# Altium PCB doppler.PcbDoc (part 1 of 2)
Units mil, origin at the board's own origin, x right, y up, seen from the top; angles counter-clockwise.
Board outline 6000 x 4000 mil, 2 copper layers (Top Layer, Bottom Layer); 102 components, 73 nets, 370 pads, 9 vias.
Unrouted connection lines stored in the file: 254.
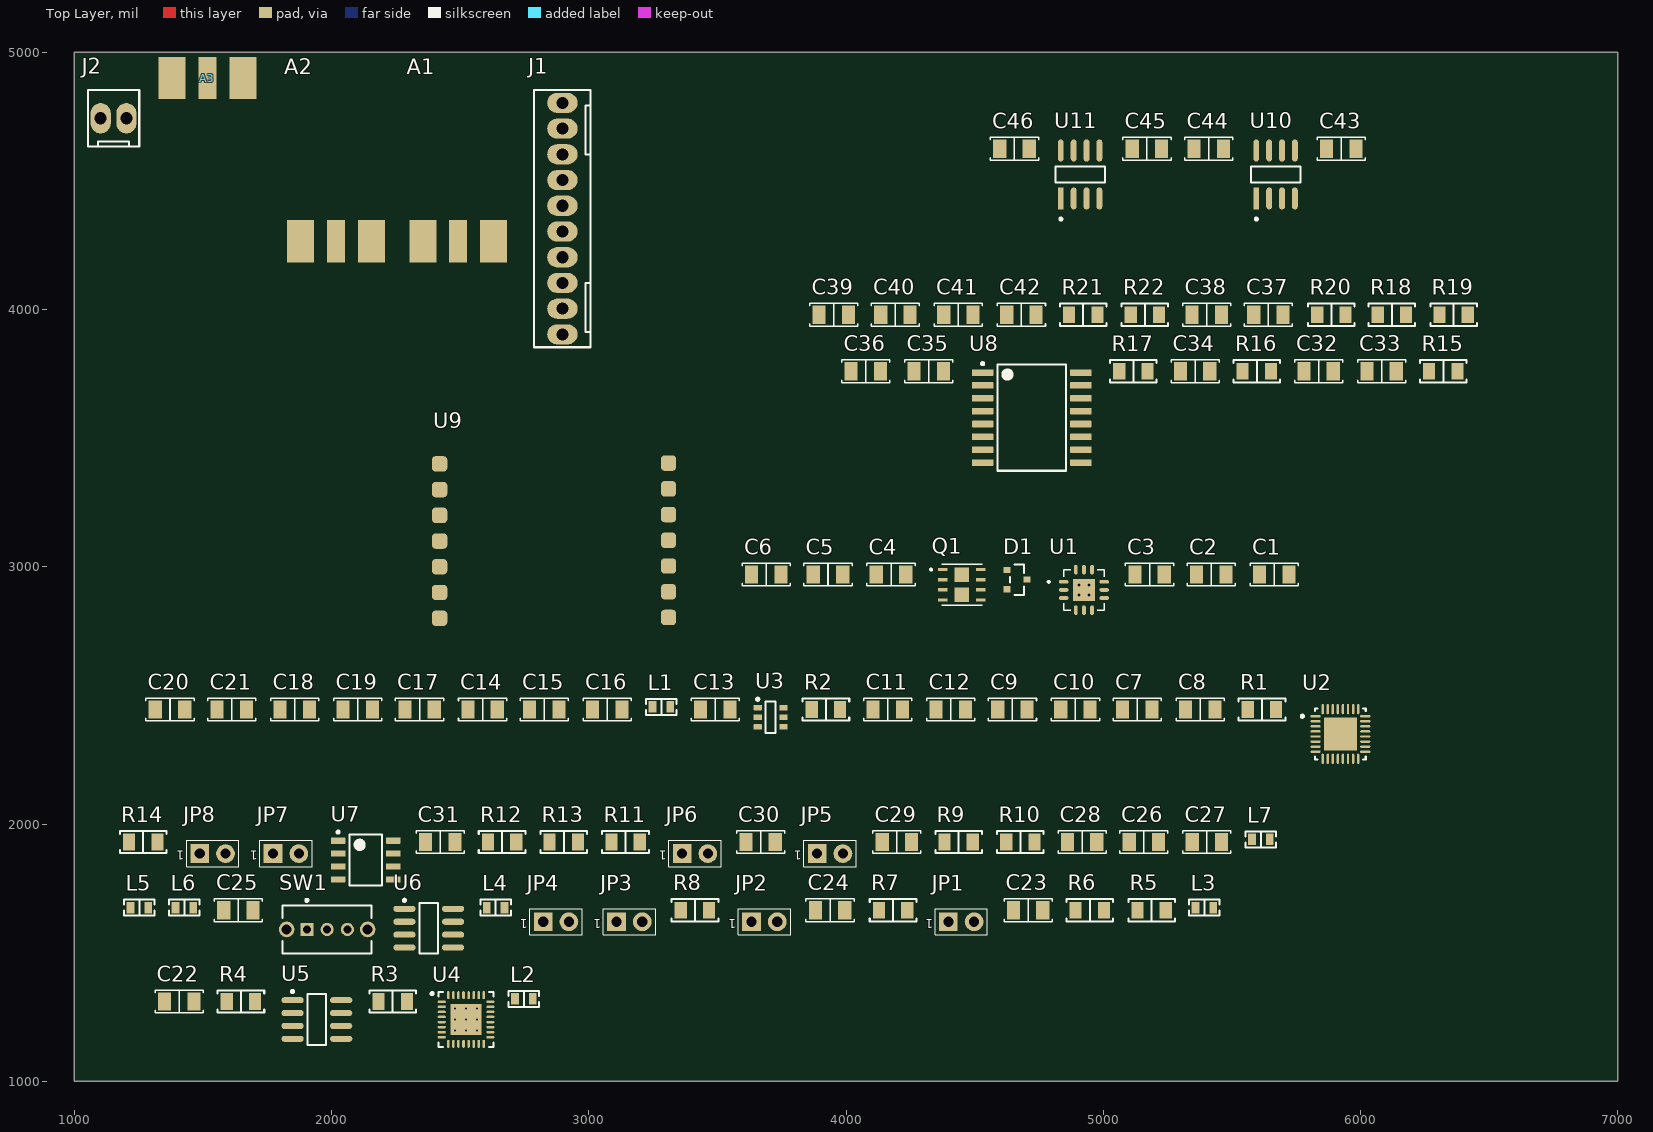
[diagram p0: Top Layer view]
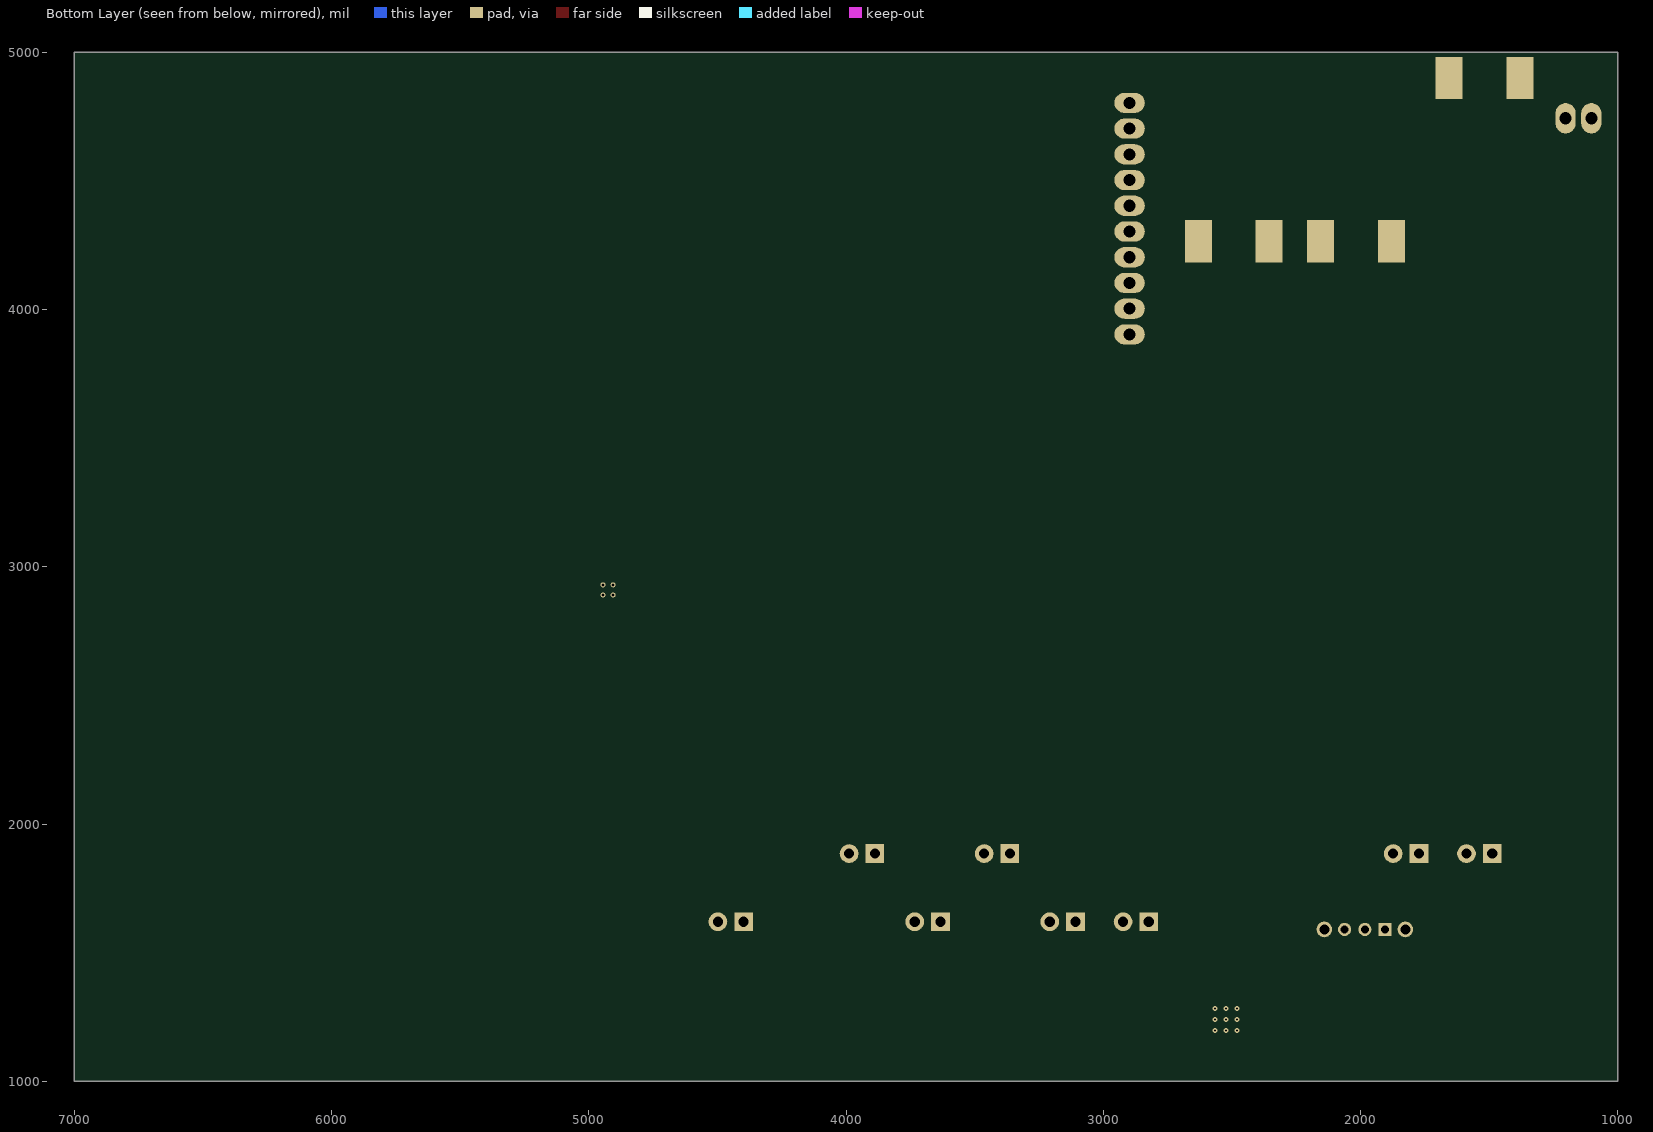
[diagram p1: Bottom Layer view, seen from below]

## Layer stack, top to bottom
Top Solder: solder mask 0.4, Solder Resist, Dk 3.5
Top Layer: signal copper 1.4
Dielectric 1: dielectric 12.6, FR-4, Dk 4.8
Bottom Layer: signal copper 1.4
Bottom Solder: solder mask 0.4, Solder Resist, Dk 3.5

## Board outline
1000,1000 7000,1000 7000,5000 1000,5000

## Design rules (kind name [scope] priority, off if disabled: settings)
Clearance [All] p1: gap=10 ignorepadtopadclearanceinfootprint=FALSE except(0: Arc-Hole Track-Hole SMDPad-Hole THPad-Hole Via-Hole Fill-Hole Poly-Hole Region-Hole Text-Hole)
PolygonConnect [All] p1: connectstyle=Relief reliefconductorwidth=10 reliefentries=4 polygonreliefangle="90 Angle" airgapwidth=10
RoomDefinition wallfilter [InComponentClass('wallfilter')] p1: confinementstyle=ConfineIn formatcopy=TRUE lockcomponents=FALSE outline 3847.09,3320 6437.09,3320 6437.09,4135 3847.09,4135
RoomDefinition preamp [InComponentClass('preamp')] p2: confinementstyle=ConfineIn formatcopy=TRUE lockcomponents=FALSE outline 1267.09,2200 6072.09,2200 6072.09,2600 1267.09,2600
RoomDefinition powerstage [InComponentClass('powerstage')] p3: confinementstyle=ConfineIn formatcopy=TRUE lockcomponents=FALSE outline 3585,2795 5770,2795 5770,3125 3585,3125
RoomDefinition demodulation [InComponentClass('demodulation')] p4: confinementstyle=ConfineIn formatcopy=TRUE lockcomponents=FALSE outline 1167.91,1075 5732.91,1075 5732.91,2085 1167.91,2085
RoomDefinition bpf [InComponentClass('bpf')] p5: confinementstyle=ConfineIn formatcopy=TRUE lockcomponents=FALSE outline 3350,2688 3350,3513 2280,3513 2280,2688
RoomDefinition 1_toplevel [InComponentClass('1_toplevel')] p6: confinementstyle=ConfineIn formatcopy=TRUE lockcomponents=FALSE outline 905,490 7780,490 7780,5610 905,5610
RoutingVias [All] p1: holewidth=28 width=50 viastyle="Through Hole" minholewidth=28 minwidth=50 maxholewidth=28 maxwidth=50
SolderMaskExpansion [All] p1: expansion=4 istentingtop=FALSE
Width [All] p1: maxlimit=10 minlimit=10 preferedwidth=10
30 further rules are at their usual default settings.

## Classes and differential pairs
component class wallfilter: C32 C33 C34 C35 C36 C37 C38 C39 C40 C41 C42 R15 R16 R17 R18 R19 R20 R21 R22 U8
component class sha: C43 C44 C45 C46 U10 U11
component class preamp: C7 C8 C9 C10 C11 C12 C13 C14 C15 C16 C17 C18 C19 C20 C21 L1 R1 R2 U2 U3
component class powerstage: C1 C2 C3 C4 C5 C6 D1 Q1 U1
component class demodulation: C22 C23 C24 C25 C26 C27 C28 C29 C30 C31 HW1 HW2 HW3 HW4 HW5 HW6 HW7 HW8 JP1 JP2 JP3 JP4 JP5 JP6 JP7 JP8 L2 L3 L4 L5 L6 L7 R3 R4 R5 R6 R7 R8 R9 R10 R11 R12 R13 R14 SW1 U4 U5 U6 U7
component class bpf: U9
component class 1_toplevel: A1 A2 A3 J1 J2

## Components (designator, comment, footprint, x,y, rotation, side; value= is the part's Value field where it differs from the comment)
A1 "0732512120" "MOLEX SD-73251-212" 2492.5,4368.35 r90 top
A2 "0732512120" "MOLEX SD-73251-212" 2017.5,4368.35 r90 top
A3 "0732512120" "MOLEX SD-73251-212" 1517.5,5003.35 r90 top
C1 "0.47µF" "CAP 1206_3216 - 1.8MM" 5665,2970 r0 top
C2 "1µF" "CAP 1206_3216 - 1.8MM" 5420,2970 r0 top
C3 "10nF 16V" "CAP 1206_3216 - 1.0MM" 5180,2970 r0 top
C4 "10nF 16V" "CAP 1206_3216 - 1.0MM" 4175,2970 r0 top
C5 "1µF" "CAP 1206_3216 - 1.8MM" 3930,2970 r0 top
C6 "0.47µF" "CAP 1206_3216 - 1.8MM" 3690,2970 r0 top
C7 "0.1µF" "CAP 1206_3216 - 1.0MM" 5132.09,2445 r0 top
C8 "1000pF" "CAP 1206_3216 - 1.2MM" 5377.09,2445 r0 top
C9 "0.1µF" "CAP 1206_3216 - 1.0MM" 4647.09,2445 r0 top
C10 "0.018µF" "CAP 1206_3216 - 1.0MM" 4892.09,2445 r0 top
C11 "1000pF" "CAP 1206_3216 - 1.2MM" 4162.09,2445 r0 top
C12 "0.1µF" "CAP 1206_3216 - 1.0MM" 4407.09,2445 r0 top
C13 "0.1µF" "CAP 1206_3216 - 1.0MM" 3492.09,2445 r0 top
C14 "1000pF" "CAP 1206_3216 - 1.2MM" 2587.09,2445 r0 top
C15 "0.1µF" "CAP 1206_3216 - 1.0MM" 2827.09,2445 r0 top
C16 "22pF" "CAP 1206_3216 - 1.0MM" 3072.09,2445 r0 top
C17 "0.1µF" "CAP 1206_3216 - 1.0MM" 2342.09,2445 r0 top
C18 "0.1µF" "CAP 1206_3216 - 1.0MM" 1857.09,2445 r0 top
C19 "1000pF" "CAP 1206_3216 - 1.2MM" 2102.09,2445 r0 top
C20 "0.1µF" "CAP 1206_3216 - 1.0MM" 1372.09,2445 r0 top
C21 "1000pF" "CAP 1206_3216 - 1.2MM" 1612.09,2445 r0 top
C22 "5.1 pF" "CAP 1206_3216 - 0.8MM" 1407.91,1310 r0 top
C23 "0.1µF" "CAP 1206_3216 - 1.0MM" 4707.91,1665 r0 top
C24 "0.1µF" "CAP 1206_3216 - 1.0MM" 3937.91,1665 r0 top
C25 "5.1 pF" "CAP 1206_3216 - 0.8MM" 1637.91,1665 r0 top
C26 "0.1µF" "CAP 1206_3216 - 1.0MM" 5157.91,1930 r0 top
C27 "0.1µF" "CAP 1206_3216 - 1.0MM" 5402.91,1930 r0 top
C28 "0.1µF" "CAP 1206_3216 - 1.0MM" 4917.91,1930 r0 top
C29 "0.1µF" "CAP 1206_3216 - 1.0MM" 4197.91,1930 r0 top
C30 "0.1µF" "CAP 1206_3216 - 1.0MM" 3667.91,1930 r0 top
C31 "0.1µF" "CAP 1206_3216 - 1.0MM" 2422.91,1930 r0 top
C32 "10000 pF" "CAP 1206_3216 - 0.8MM" 5837.09,3760 r0 top
C33 "10 µF" "CAP 1206_3216 - 0.8MM" 6082.09,3760 r0 top
C34 "10000 pF" "CAP 1206_3216 - 0.8MM" 5357.09,3760 r0 top
C35 "40nF" "CAP 1206_3216 - 1.8MM" 4322.09,3760 r0 top
C36 "10 µF" "CAP 1206_3216 - 0.8MM" 4077.09,3760 r0 top
C37 "40nF" "CAP 1206_3216 - 1.8MM" 5642.09,3980 r0 top
C38 "10 µF" "CAP 1206_3216 - 0.8MM" 5402.09,3980 r0 top
C39 "0.1µF" "CAP 1206_3216 - 1.0MM" 3952.09,3980 r0 top
C40 "1000pF" "CAP 1206_3216 - 1.2MM" 4192.09,3980 r0 top
C41 "0.1µF" "CAP 1206_3216 - 1.0MM" 4437.09,3980 r0 top
C42 "1000pF" "CAP 1206_3216 - 1.2MM" 4682.09,3980 r0 top
C43 "0.1µF" "CAP 1206_3216 - 1.0MM" 5925,4625 r0 top
C44 "0.1µF" "CAP 1206_3216 - 1.0MM" 5410,4625 r0 top
C45 "0.1µF" "CAP 1206_3216 - 1.0MM" 5170,4625 r0 top
C46 "0.1µF" "CAP 1206_3216 - 1.0MM" 4655,4625 r0 top
D1 "BAV99,215" FP-SOT23-MFG 4665,2950 r0 top
J1 "0022272101" "MOLEX KK 0022272101" 2897.5,4353.35 r90 top
J2 "0022272021" "MOLEX KK 0022272021" 1152.5,4743.35 r0 top
JP1 "Jumper_Header 2x1 Fitted" CON_SAMTEC_TSW-102-07-G-S 4447.91,1620 r0 top value="Shunt Fitted"
JP2 "Jumper_Header 2x1 Fitted" CON_SAMTEC_TSW-102-07-G-S 3682.91,1620 r0 top value="Shunt Fitted"
JP3 "Jumper_Header 2x1 Fitted" CON_SAMTEC_TSW-102-07-G-S 3157.91,1620 r0 top value="Shunt Fitted"
JP4 "Jumper_Header 2x1 Fitted" CON_SAMTEC_TSW-102-07-G-S 2872.91,1620 r0 top value="Shunt Fitted"
JP5 "Jumper_Header 2x1 Fitted" CON_SAMTEC_TSW-102-07-G-S 3937.91,1885 r0 top value="Shunt Fitted"
JP6 "Jumper_Header 2x1 Fitted" CON_SAMTEC_TSW-102-07-G-S 3412.91,1885 r0 top value="Shunt Fitted"
JP7 "Jumper_Header 2x1 Fitted" CON_SAMTEC_TSW-102-07-G-S 1822.91,1885 r0 top value="Shunt Fitted"
JP8 "Jumper_Header 2x1 Fitted" CON_SAMTEC_TSW-102-07-G-S 1537.91,1885 r0 top value="Shunt Fitted"
L1 "120nH" "IND 0603_1608 RF WW" 3282.09,2455 r0 top
L2 "120nH" "IND 0603_1608 RF WW" 2747.91,1320 r0 top
L3 "120nH" "IND 0603_1608 RF WW" 5392.91,1675 r0 top
L4 "120nH" "IND 0603_1608 RF WW" 2637.91,1675 r0 top
L5 "120nH" "IND 0603_1608 RF WW" 1252.91,1675 r0 top
L6 "120nH" "IND 0603_1608 RF WW" 1427.91,1675 r0 top
L7 "120nH" "IND 0603_1608 RF WW" 5612.91,1940 r0 top
Q1 "TC6320K6-G" SON100P400X400X100-10N 4450,2930 r0 top
R1 "280 Ohms" "RES 1206_3216" 5617.09,2445 r0 top
R2 "R_CLMP?" "RES 1206_3216" 3922.09,2445 r0 top value="1 kOhms"
R3 "20 Ohms" "RES 1206_3216" 2237.91,1310 r0 top
R4 "20 Ohms" "RES 1206_3216" 1647.91,1310 r0 top
R5 "150 kOhms" "RES 1206_3216" 5187.91,1665 r0 top
R6 "150 kOhms" "RES 1206_3216" 4947.91,1665 r0 top
R7 "150 kOhms" "RES 1206_3216" 4182.91,1665 r0 top
R8 "150 kOhms" "RES 1206_3216" 3412.91,1665 r0 top
R9 "33.2 kOhms" "RES 1206_3216" 4437.91,1930 r0 top
R10 "33.2 kOhms" "RES 1206_3216" 4677.91,1930 r0 top
R11 "49.9 Ohms" "RES 1206_3216" 3142.91,1930 r0 top
R12 "31.6 kOhms" "RES 1206_3216" 2662.91,1930 r0 top
R13 "31.6 kOhms" "RES 1206_3216" 2902.91,1930 r0 top
R14 "1.5 kOhms" "RES 1206_3216" 1267.91,1930 r0 top
R15 "10 kOhms" "RES 1206_3216" 6322.09,3760 r0 top
R16 "5 kOhms" "RES 1206_3216" 5597.09,3760 r0 top
R17 "100 kOhms" "RES 1206_3216" 5117.09,3760 r0 top
R18 "40 kOhms" "RES 1206_3216" 6122.09,3980 r0 top
R19 "150 kOhms" "RES 1206_3216" 6362.09,3980 r0 top
R20 "100 kOhms" "RES 1206_3216" 5887.09,3980 r0 top
R21 "40 kOhms" "RES 1206_3216" 4922.09,3980 r0 top
R22 "150 kOhms" "RES 1206_3216" 5162.09,3980 r0 top
SW1 "1825232-1" FP-1825232-1-MFG 1982.91,1590 r0 top
U1 "MD1213K6-G" QFN80P400X400X90-13N 4925,2910 r0 top
U2 "AD8332ACPZ-R7" FP-CP-32-7-IPC_A 5922.09,2350 r0 top
U3 "OPA847IDBVR" DBV0006A_L 3707.09,2415 r0 top
U4 "AD8333ACPZ-REEL7" ADI-CP-32-2_L 2522.91,1240 r0 top
U5 "AD8021ARZ" ADI-R-8_N 1942.91,1240 r0 top
U6 "AD8021ARZ" ADI-R-8_N 2377.91,1595 r0 top
U7 "DS90C401MX" D0008A_N 2132.91,1860 r0 top
U8 "TLE2074CDW" DW0016A_M 4722.09,3580 r0 top
U9 "BPF-C4R5+" BPF-C4R5+-Footprint-1 2430,2703 r90 top
U10 "AD783JRZ" FP-R-8-IPC_B 5670,4525 r90 top
U11 "AD783JRZ" FP-R-8-IPC_B 4910,4525 r90 top

## Footprints (in the part's own frame and the unit in brackets; to place one, negate y for a bottom-side part, rotate by r counter-clockwise, add the part's x,y. Pads: shape width x height; smd on the part's side, far side on the other; paste and mask are expansions set on the pad)
ADI-CP-32-2_L [mm] "QFN, 32-Leads, Body 5x5mm, Pitch 0.5mm, Thermal Pad 3.1x3.1mm, IPC High Density"
  oval 0.8x0.25 smd: 1(-2.4,1.75) 2(-2.4,1.25) 3(-2.4,0.75) 4(-2.4,0.25) 5(-2.4,-0.25) 6(-2.4,-0.75) 7(-2.4,-1.25) 8(-2.4,-1.75) 17(2.4,-1.75) 18(2.4,-1.25) 19(2.4,-0.75) 20(2.4,-0.25) 21(2.4,0.25) 22(2.4,0.75) 23(2.4,1.25) 24(2.4,1.75)
  oval 0.25x0.8 smd: 9(-1.75,-2.4) 10(-1.25,-2.4) 11(-0.75,-2.4) 12(-0.25,-2.4) 13(0.25,-2.4) 14(0.75,-2.4) 15(1.25,-2.4) 16(1.75,-2.4) 25(1.75,2.4) 26(1.25,2.4) 27(0.75,2.4) 28(0.25,2.4) 29(-0.25,2.4) 30(-0.75,2.4) 31(-1.25,2.4) 32(-1.75,2.4)
  rect 3.1x3.1 smd: 33(0,0)
  silkscreen extent -3.47,-2.7 2.7,2.7, body extent -2.55,-2.55 2.55,2.55, height 1
ADI-R-8_N [mm] "SOIC, 8-Leads, Body 4.9x3.9mm, Pitch 1.27mm, IPC Medium Density"
  oval 2.2x0.6 smd: 1(-2.4,1.905) 2(-2.4,0.635) 3(-2.4,-0.635) 4(-2.4,-1.905) 5(2.4,-1.905) 6(2.4,-0.635) 7(2.4,0.635) 8(2.4,1.905)
  silkscreen extent -2.52,-2.5 0.9,2.88, body extent -2,-2.5 2,2.5, height 1.75
BPF-C4R5+-Footprint-1 [mil]
  rrect50% 60x60 smd: 1(97,10) 2(197,10) 3(297,10) 4(397,10) 5(497,10) 6(597,10) 7(697,10) 8(700,-880) 9(600,-880) 10(500,-880) 11(400,-880) 12(300,-880) 13(200,-880) 14(100,-880)
  body extent 0,-870 800,0, height 370
"CAP 1206_3216 - 0.8MM" [mm] "Chip Capacitor, 2-Leads, Body 3.25x1.60mm, IPC Medium Density"
  rect 1.3x1.8 smd: 1(-1.45,0) 2(1.45,0)
  silkscreen extent -2.37,-1.12 2.37,1.12, body extent -1.6,-0.8 1.6,0.8, height 0.8
"CAP 1206_3216 - 1.0MM" [mm] "Chip Capacitor, 2-Leads, Body 3.25x1.60mm, IPC Medium Density"
  rect 1.3x1.8 smd: 1(-1.45,0) 2(1.45,0)
  silkscreen extent -2.37,-1.12 2.37,1.12, body extent -1.6,-0.8 1.6,0.8, height 1
"CAP 1206_3216 - 1.2MM" [mm] "Chip Capacitor, 2-Leads, Body 3.25x1.60mm, IPC Medium Density"
  rect 1.3x1.8 smd: 1(-1.45,0) 2(1.45,0)
  silkscreen extent -2.37,-1.12 2.37,1.12, body extent -1.6,-0.8 1.6,0.8, height 1.2
"CAP 1206_3216 - 1.8MM" [mm] "Chip Capacitor, 2-Leads, Body 3.25x1.60mm, IPC Medium Density"
  rect 1.3x1.8 smd: 1(-1.45,0) 2(1.45,0)
  silkscreen extent -2.37,-1.12 2.37,1.12, body extent -1.6,-0.8 1.6,0.8, height 1.8
CON_SAMTEC_TSW-102-07-G-S [mm]
  rect 1.85x1.85 / inner round 1.85 / far side rect 1.85x1.85 hole 1 mask+0.05: 1(-1.27,0)
  round 1.85 hole 1 mask+0.05: 2(1.27,0)
  silkscreen extent -2.58,-1.3 2.58,1.3, body extent -2.67,-1.3 2.58,1.3, height 8.38
D0008A_N [mm] "SOIC, 8-Leads, Body 5x4mm, Pitch 1.27mm, IPC Medium Density"
  rrect17% 1.45x0.6 smd: 1(-2.725,1.905) 2(-2.725,0.635) 3(-2.725,-0.635) 4(-2.725,-1.905) 5(2.725,-1.905) 6(2.725,-0.635) 7(2.725,0.635) 8(2.725,1.905)
  silkscreen extent -2.85,-2.5 1.6,2.88, body extent -3,-2.45 3,2.45, height 1.63
DBV0006A_L [mm] "SOT23, 6-Leads, Body 3.05x1.75mm, Pitch 0.95mm, IPC High Density"
  rrect18% 0.8x0.55 smd: 1(-1.275,0.95) 2(-1.275,0) 3(-1.275,-0.95) 4(1.275,-0.95) 5(1.275,0) 6(1.275,0.95)
  silkscreen extent -1.4,-1.55 0.5,1.9, body extent -1.42,-1.46 1.42,1.46, height 1.11
DW0016A_M [mm] "SOIC, 16-Leads, Body 10.5x7.6mm, Pitch 1.27mm, IPC Low Density"
  rrect15% 2.1x0.65 smd: 1(-4.85,4.445) 2(-4.85,3.175) 3(-4.85,1.905) 4(-4.85,0.635) 5(-4.85,-0.635) 6(-4.85,-1.905) 7(-4.85,-3.175) 8(-4.85,-4.445) 9(4.85,-4.445) 10(4.85,-3.175) 11(4.85,-1.905) 12(4.85,-0.635) 13(4.85,0.635) 14(4.85,1.905) 15(4.85,3.175) 16(4.85,4.445)
  silkscreen extent -4.97,-5.25 3.4,5.44, body extent -5.14,-5.13 5.14,5.13, height 2.5
FP-1825232-1-MFG [mm]
  rect 1.3x1.3 hole 0.8 paste-1000 mask+0: 1(-2,0)
  round 1.3 hole 0.8 paste-1000 mask+0: 2(0,0) 3(2,0)
  round 1.55 hole 1 paste-1000 mask+0: 4(-4,0) 5(4,0)
  silkscreen extent -4.4,-2.35 4.4,3, body extent -4.87,-5.45 4.87,2.45, height 0.25
FP-CP-32-7-IPC_A [mm]
  rect 1.01x0.239 smd paste+0 mask+0: 1(-2.451,1.75)
  rrect100% 1.01x0.239 smd paste+0 mask+0: 2(-2.451,1.25) 3(-2.451,0.75) 4(-2.451,0.25) 5(-2.451,-0.25) 6(-2.451,-0.75) 7(-2.451,-1.25) 8(-2.451,-1.75) 17(2.451,-1.75) 18(2.451,-1.25) 19(2.451,-0.75) 20(2.451,-0.25) 21(2.451,0.25) 22(2.451,0.75) 23(2.451,1.25) 24(2.451,1.75)
  rrect100% 0.239x1.01 smd paste+0 mask+0: 9(-1.75,-2.451) 10(-1.25,-2.451) 11(-0.75,-2.451) 12(-0.25,-2.451) 13(0.25,-2.451) 14(0.75,-2.451) 15(1.25,-2.451) 16(1.75,-2.451) 25(1.75,2.451) 26(1.25,2.451) 27(0.75,2.451) 28(0.25,2.451) 29(-0.25,2.451) 30(-0.75,2.451) 31(-1.25,2.451) 32(-1.75,2.451)
  rect 3.25x3.25 smd paste-1000 mask+0: 33(0,0)
  silkscreen extent -3.88,-2.5 2.5,2.5
FP-R-8-IPC_B [mil]
  rect 85.59x22.92 smd paste+0 mask+0: 1(-93.15,75)
  rrect100% 85.59x22.92 smd paste+0 mask+0: 2(-93.15,25) 3(-93.15,-25) 4(-93.15,-75) 5(93.15,-75) 6(93.15,-25) 7(93.15,25) 8(93.15,75)
  silkscreen extent -178,-96 31,96, body extent -146,-106 146,106, height 10
FP-SOT23-MFG [mm]
  rect 0.7x0.6 smd paste-1000 mask+0: 1(-1,0.95) 2(-1,-0.95) 3(1,0)
  silkscreen extent -0.7,-1.5 0.7,1.5, body extent -1.5,-1.65 1.5,1.65, height 0.25
"IND 0603_1608 RF WW" [mm] "Chip Inductor, 2-Leads, Body 1.65x0.99mm, IPC Medium Density"
  rect 0.76x1.13 smd: 1(-0.875,0) 2(0.875,0)
  silkscreen extent -1.5,-0.8 1.5,0.8, body extent -0.84,-0.58 0.83,0.58, height 1
"MOLEX KK 0022272021" [mm]
  oval 2x3 hole 1.2: 1(-1.27,0) 2(1.27,0)
  silkscreen extent -2.54,-2.79 2.54,2.79, body extent -2.54,-2.9 2.54,2.9, height 11.7
"MOLEX KK 0022272101" [mm]
  oval 2x3 hole 1.2: 1(-11.43,0) 2(-8.89,0) 3(-6.35,0) 4(-3.81,0) 5(-1.27,0) 6(1.27,0) 7(3.81,0) 8(6.35,0) 9(8.89,0) 10(11.43,0)
  silkscreen extent -12.7,-2.79 12.7,2.79, body extent -12.7,-2.9 12.7,2.9, height 11.7
"MOLEX SD-73251-212" [mm]
  rect 4.19x2.665 smd: G(-2.625,3.492) G(-2.625,-3.492)
  rect 4.19x2.665 smd far side: G(-2.625,3.492) G(-2.625,-3.492)
  rect 4.19x1.78 smd: S(-2.625,0)
  body extent -3.81,-3.17 12.45,3.18, height 3.88
QFN80P400X400X90-13N [mm]
  oval 0.95x0.37 smd: 1(-2,0.8) 2(-2,0) 3(-2,-0.8) 7(2,-0.8) 8(2,0) 9(2,0.8)
  oval 0.37x0.95 smd: 4(-0.8,-2) 5(0,-2) 6(0.8,-2) 10(0.8,2) 11(0,2) 12(-0.8,2)
  rect 2.2x2.2 smd paste-0.404: 13(0,0)
  round 0.5 hole 0.3 mask+0: 14(-0.5,0.5) 15(0.5,0.5) 16(-0.5,-0.5) 17(0.5,-0.5)
  silkscreen extent -3.57,-2 2,2
"RES 1206_3216" [mm] "Chip Resistor, 2-Leads, Body 3.13x1.55mm, IPC Medium Density"
  rect 1.2x1.65 smd: 1(-1.4,0) 2(1.4,0)
  silkscreen extent -2.3,-1.1 2.3,1.1, body extent -1.6,-0.8 1.6,0.8, height 0.6
SON100P400X400X100-10N [mm]
  rrect25% 0.96x0.32 smd: 1(-1.885,1.5) 2(-1.885,0.5) 3(-1.885,-0.5) 4(-1.885,-1.5) 5(1.885,-1.5) 6(1.885,-0.5) 7(1.885,0.5) 8(1.885,1.5)
  rect 1.45x1.45 smd paste-0.265: 9(0,0.975) 10(0,-0.975)
  silkscreen extent -3.12,-2.02 2,2.02

## Part data
A1 A2 A3: "CONN SMA JACK STR 50OHM EDGE MNT", Frequency - Max=18GHz, Housing Color=Gold, Manufacturer=Molex, Supplier Part Number 1=WM5536-ND, ComponentLink1Description=Datasheet, ComponentLink1URL=https://www.molex.com/pdm_docs/sd/732512120_sd.pdf, ComponentLink2Description="DigiKey Link", ComponentLink2URL=http://digikey.com/product-detail/en/molex/0732512120/WM5536-ND/1465158, Connector Style=SMA, Connector Type="Jack, Female Socket", Contact Termination=Solder, Fastening Type=Threaded, Impedance=50Ohm, LastUpdated="2022-06-29 18:09:19", Lifecycle Status=Active, Minimum Order=1, Mounting Feature="Bulkhead - Front Side Nut", Mounting Type="Board Edge, End Launch; Panel Mount", Number of Ports=1, Packaging=Bag, Part Number=0732512120, Part Status=Active, Price=3.64, Series=73251, Shield Termination=Solder, Supplier 1=DigiKey
C1 C6: library part 12063C474KAT2A, "CAP CER 0.47UF 25V X7R 1206", Device Package="1206 (3216 Metric)", Manufacturer="AVX Corporation", Operating Temperature="-55°C ~ 125°C", Supplier Part Number 1=478-1563-1-ND, Temperature Coefficient=X7R, Tolerance=±10%, Voltage - Rated=25V, Applications="General Purpose", Capacitance=0.47µF, ComponentLink1Description=Datasheet, ComponentLink1URL=http://datasheets.avx.com/X7RDielectric.pdf, ComponentLink2Description="DigiKey Link", ComponentLink2URL=http://digikey.com/product-detail/en/avx-corporation/12063C474KAT2A/478-1563-1-ND/564595, LastUpdated="2020-09-02 01:05:39", Lifecycle Status=Active, Minimum Order=1, Mounting Type="Surface Mount, MLCC", Package / Case="1206 (3216 Metric)", Packaging=TapeAndReel, Part Number=12063C474KAT2A, Part Status=Active, partid=20474, Price=0.08, Series=-, Size / Dimension="0.126\" L x 0.063\" W (3.20mm x 1.60mm)", Supplier 1=DigiKey, Thickness (Max)="0.050\" (1.27mm)"
C2 C5: library part 12063G105ZAT2A, "CAP CER 1UF 25V Y5V 1206", Device Package="1206 (3216 Metric)", Manufacturer="AVX Corporation", Operating Temperature="-30°C ~ 85°C", Supplier Part Number 1=478-5906-1-ND, Temperature Coefficient="Y5V (F)", Tolerance="-20%, +80%", Voltage - Rated=25V, Applications="General Purpose", Capacitance=1µF, ComponentLink1Description=Datasheet, ComponentLink1URL=http://datasheets.avx.com/Y5V.pdf, ComponentLink2Description="DigiKey Link", ComponentLink2URL=http://digikey.com/product-detail/en/avx-corporation/12063G105ZAT2A/478-5906-1-ND/2177838, LastUpdated="2020-09-02 01:05:35", Lifecycle Status=Active, Minimum Order=1, Mounting Type="Surface Mount, MLCC", Package / Case="1206 (3216 Metric)", Packaging=TapeAndReel, Part Number=12063G105ZAT2A, Part Status=Active, partid=21454, Price=0.07, Series=-, Size / Dimension="0.126\" L x 0.063\" W (3.20mm x 1.60mm)", Supplier 1=DigiKey, Thickness (Max)="0.050\" (1.27mm)"
C3 C4: library part 12061C103KAT2A, "CAP CER 10000PF 100V X7R 1206", Capacitance=10000pF, Device Package="1206 (3216 Metric)", Manufacturer="AVX Corporation", Operating Temperature="-55°C ~ 125°C", Supplier Part Number 1=478-1523-1-ND, Temperature Coefficient=X7R, Tolerance=±10%, Voltage - Rated=100V, Applications="General Purpose", ComponentLink1Description=Datasheet, ComponentLink1URL=http://datasheets.avx.com/X7RDielectric.pdf, ComponentLink2Description="DigiKey Link", ComponentLink2URL=http://digikey.com/product-detail/en/avx-corporation/12061C103KAT2A/478-1523-1-ND/564555, LastUpdated="2020-09-02 01:05:00", Lifecycle Status=Active, Minimum Order=1, Mounting Type="Surface Mount, MLCC", Package / Case="1206 (3216 Metric)", Packaging=TapeAndReel, Part Number=12061C103KAT2A, Part Status=Active, partid=20306, Price=0.06, Series=-, Size / Dimension="0.126\" L x 0.063\" W (3.20mm x 1.60mm)", Supplier 1=DigiKey, Thickness (Max)="0.037\" (0.94mm)"
C7 C9 C12 C13 C15 C17 C18 C20 C23 C24 C26 C27 C28 C29 C30 C31 C39 C41 C43 C44 C45 C46: library part 12065C104JAT2A, "CAP CER 0.1UF 50V X7R 1206", Device Package="1206 (3216 Metric)", Manufacturer="AVX Corporation", Operating Temperature="-55°C ~ 125°C", Supplier Part Number 1=478-3797-1-ND, Temperature Coefficient=X7R, Tolerance=±5%, Voltage - Rated=50V, Applications="General Purpose", Capacitance=0.1µF, ComponentLink1Description=Datasheet, ComponentLink1URL=http://datasheets.avx.com/X7RDielectric.pdf, ComponentLink2Description="DigiKey Link", ComponentLink2URL=http://digikey.com/product-detail/en/avx-corporation/12065C104JAT2A/478-3797-1-ND/1116495, LastUpdated="2020-09-02 01:05:06", Lifecycle Status=Active, Minimum Order=1, Mounting Type="Surface Mount, MLCC", Package / Case="1206 (3216 Metric)", Packaging=TapeAndReel, Part Number=12065C104JAT2A, Part Status=Active, partid=19088, Price=0.06, Series=-, Size / Dimension="0.126\" L x 0.063\" W (3.20mm x 1.60mm)", Supplier 1=DigiKey, Thickness (Max)="0.037\" (0.94mm)"
C8 C11 C14 C19 C21 C40 C42: library part 12067C102KAT2A, "CAP CER 1000PF 500V X7R 1206", Device Package="1206 (3216 Metric)", Manufacturer="AVX Corporation", Operating Temperature="-55°C ~ 125°C", Supplier Part Number 1=478-3805-1-ND, Temperature Coefficient=X7R, Tolerance=±10%, Voltage - Rated=500V, Applications="General Purpose", Capacitance=1000pF, ComponentLink1Description=Datasheet, ComponentLink1URL=http://datasheets.avx.com/X7RDielectric.pdf, ComponentLink2Description="DigiKey Link", ComponentLink2URL=http://digikey.com/product-detail/en/avx-corporation/12067C102KAT2A/478-3805-1-ND/1116503, LastUpdated="2020-09-02 01:05:09", Lifecycle Status=Active, Minimum Order=1, Mounting Type="Surface Mount, MLCC", Package / Case="1206 (3216 Metric)", Packaging=TapeAndReel, Part Number=12067C102KAT2A, Part Status=Active, partid=19161, Price=0.09, Series=-, Size / Dimension="0.126\" L x 0.063\" W (3.20mm x 1.60mm)", Supplier 1=DigiKey, Thickness (Max)="0.040\" (1.02mm)"
C10: library part 12061C183KAT2A, "CAP CER 0.018UF 100V X7R 1206", Device Package="1206 (3216 Metric)", Manufacturer="AVX Corporation", Operating Temperature="-55°C ~ 125°C", Supplier Part Number 1=478-10859-1-ND, Temperature Coefficient=X7R, Tolerance=±10%, Voltage - Rated=100V, Applications="General Purpose", Capacitance=0.018µF, ComponentLink1Description=Datasheet, ComponentLink1URL=http://datasheets.avx.com/X7RDielectric.pdf, ComponentLink2Description="DigiKey Link", ComponentLink2URL=http://digikey.com/product-detail/en/avx-corporation/12061C183KAT2A/478-10859-1-ND/7536389, LastUpdated="2020-09-02 01:05:02", Lifecycle Status=Active, Minimum Order=1, Mounting Type="Surface Mount, MLCC", Package / Case="1206 (3216 Metric)", Packaging=TapeAndReel, Part Number=12061C183KAT2A, Part Status=Active, partid=19920, Price=0.05, Series=-, Size / Dimension="0.126\" L x 0.063\" W (3.20mm x 1.60mm)", Supplier 1=DigiKey, Thickness (Max)="0.037\" (0.94mm)"
C16: library part 12065A220JAT2A, "CAP CER 22PF 50V C0G/NP0 1206", Device Package="1206 (3216 Metric)", Manufacturer="AVX Corporation", Operating Temperature="-55°C ~ 125°C", Supplier Part Number 1=478-1472-1-ND, Temperature Coefficient="C0G, NP0", Tolerance=±5%, Voltage - Rated=50V, Applications="General Purpose", Capacitance=22pF, ComponentLink1Description=Datasheet, ComponentLink1URL=http://datasheets.avx.com/C0GNP0-Dielectric.pdf, ComponentLink2Description="DigiKey Link", ComponentLink2URL=http://digikey.com/product-detail/en/avx-corporation/12065A220JAT2A/478-1472-1-ND/564504, LastUpdated="2020-09-02 01:04:55", Lifecycle Status=Active, Minimum Order=1, Mounting Type="Surface Mount, MLCC", Package / Case="1206 (3216 Metric)", Packaging=TapeAndReel, Part Number=12065A220JAT2A, Part Status=Active, partid=21165, Price=0.07, Series=-, Size / Dimension="0.126\" L x 0.063\" W (3.20mm x 1.60mm)", Supplier 1=DigiKey, Thickness (Max)="0.037\" (0.94mm)"
C22 C25: library part C1206C519C5GAC7800, "CAP CER 5.1PF 50V C0G/NP0 1206", Device Package="1206 (3216 Metric)", Manufacturer=KEMET, Operating Temperature="-55°C ~ 125°C", Supplier Part Number 1=399-C1206C519C5GAC7800CT-ND, Temperature Coefficient="C0G, NP0", Tolerance=±0.25pF, Voltage - Rated=50V, Applications="General Purpose", Capacitance="5.1 pF", ComponentLink1Description=Datasheet, ComponentLink1URL=https://api.kemet.com/component-edge/download/datasheet/C1206C519C5GACTU.pdf, ComponentLink2Description="DigiKey Link", ComponentLink2URL=https://www.digikey.com/en/products/detail/kemet/C1206C519C5GAC7800/411185, Features="Low ESL", LastUpdated="2023-04-30 19:15:17", Lifecycle Status=Active, Minimum Order=1, Mounting Type="Surface Mount, MLCC", Package / Case="1206 (3216 Metric)", Packaging=TapeAndReel, Part Number=C1206C519C5GAC7800, Part Status=Active, partid=30067, Price=0.16, Series="SMD Comm C0G", Size / Dimension="0.126\" L x 0.063\" W (3.20mm x 1.60mm)", Supplier 1=DigiKey, Thickness (Max)="0.035\" (0.88mm)"
C32 C34: library part 1206B103K500CT, "CAP CER 10000PF 50V X7R 1206", Device Package="1206 (3216 Metric)", Manufacturer="Walsin Technology Corporation", Operating Temperature="-55°C ~ 125°C", Supplier Part Number 1=1292-1600-1-ND, Temperature Coefficient=X7R, Tolerance=±10%, Voltage - Rated=50V, Applications="General Purpose", Capacitance="10000 pF", ComponentLink1Description=Datasheet, ComponentLink1URL=http://www.passivecomponent.com/wp-content/uploads/2018/10/MLCC.pdf, ComponentLink2Description="DigiKey Link", ComponentLink2URL=https://www.digikey.com/en/products/detail/walsin-technology-corporation/1206B103K500CT/9355097, LastUpdated="2023-04-30 19:15:57", Lifecycle Status=Active, Minimum Order=1, Mounting Type="Surface Mount, MLCC", Package / Case="1206 (3216 Metric)", Packaging=TapeAndReel, Part Number=1206B103K500CT, Part Status=Active, partid=19113, Price=0.01, Series=-, Size / Dimension="0.126\" L x 0.063\" W (3.20mm x 1.60mm)", Supplier 1=DigiKey, Thickness (Max)="0.035\" (0.90mm)"
C33 C36 C38: library part GRM31CR71E106KA12K, "CAP CER 10UF 25V X7R 1206", Device Package="1206 (3216 Metric)", Manufacturer="Murata Electronics", Operating Temperature="-55°C ~ 125°C", Supplier Part Number 1=490-14678-1-ND, Temperature Coefficient=X7R, Tolerance=±10%, Voltage - Rated=25V, Applications="General Purpose", Capacitance="10 µF", ComponentLink1Description=Datasheet, ComponentLink1URL=https://search.murata.co.jp/Ceramy/image/img/A01X/G101/ENG/GRM31CR71E106KA12-01.pdf, ComponentLink2Description="DigiKey Link", ComponentLink2URL=https://www.digikey.com/en/products/detail/murata-electronics/GRM31CR71E106KA12K/4905618, LastUpdated="2023-04-30 19:16:01", Lifecycle Status=Active, Minimum Order=1, Mounting Type="Surface Mount, MLCC", Package / Case="1206 (3216 Metric)", Packaging=TapeAndReel, Part Number=GRM31CR71E106KA12K, Part Status=Active, partid=19493, Price=0.06, Series=GRM, Size / Dimension="0.126\" L x 0.063\" W (3.20mm x 1.60mm)", Supplier 1=DigiKey, Thickness (Max)="0.071\" (1.80mm)"
C35 C37: library part 12065C474JAT2A, "CAP CER 0.47UF 50V X7R 1206", Capacitance=0.47µF, Device Package="1206 (3216 Metric)", Manufacturer="AVX Corporation", Operating Temperature="-55°C ~ 125°C", Supplier Part Number 1=478-5784-1-ND, Temperature Coefficient=X7R, Tolerance=±5%, Voltage - Rated=50V, Applications="General Purpose", ComponentLink1Description=Datasheet, ComponentLink1URL=http://datasheets.avx.com/X7RDielectric.pdf, ComponentLink2Description="DigiKey Link", ComponentLink2URL=http://digikey.com/product-detail/en/avx-corporation/12065C474JAT2A/478-5784-1-ND/2136376, LastUpdated="2020-09-02 01:05:40", Lifecycle Status=Active, Minimum Order=1, Mounting Type="Surface Mount, MLCC", Package / Case="1206 (3216 Metric)", Packaging=TapeAndReel, Part Number=12065C474JAT2A, Part Status=Active, partid=20070, Price=0.08, Series=-, Size / Dimension="0.126\" L x 0.063\" W (3.20mm x 1.60mm)", Supplier 1=DigiKey, Thickness (Max)="0.060\" (1.52mm)"
D1: library part CMP-14399-000006-1, "DIODE ARRAY GP 100V 215MA SOT23"
J1: "CONN HEADER VERT 10POS 2.54MM", Insulation Color=Natural, Manufacturer=Molex, Material Flammability Rating="UL94 V-0", Supplier Part Number 1=WM4119-ND, ComponentLink1Description=Datasheet, ComponentLink1URL=https://www.molex.com/pdm_docs/sd/022272101_sd.pdf, ComponentLink2Description="DigiKey Link", ComponentLink2URL=http://digikey.com/product-detail/en/molex/0022272101/WM4119-ND/1130585, Connector Type=Header, Contact Finish - Mating=Tin, Contact Finish - Post=Tin, Contact Finish Thickness - Mating="100.0µin (2.54µm)", Contact Length - Mating="0.295\" (7.49mm)", Contact Length - Post="0.140\" (3.56mm)", Contact Material=Brass, Contact Shape=Square, Contact Type="Male Pin", Fastening Type="Friction Lock", Insulation Height="0.461\" (11.70mm)", Insulation Material="Polyamide (PA), Nylon", LastUpdated="2020-01-12 23:53:02", Lifecycle Status=Active, Minimum Order=1, Mounting Type="Through Hole", Number of Positions=10, Number of Positions Loaded=All, Number of Rows=1, Overall Contact Length="0.560\" (14.22mm)", Packaging=Bulk, Part Number=0022272101, Part Status=Active, partid=84, Pitch - Mating="0.100\" (2.54mm)", Price=0.73, Series="KK 6410", Shrouding="Shrouded - 1 Wall", Style="Board to Cable/Wire", Supplier 1=DigiKey, Termination=Solder
J2: "CONN HEADER VERT 2POS 2.54MM", Insulation Color=Natural, Manufacturer=Molex, Material Flammability Rating="UL94 V-0", Supplier Part Number 1=WM4111-ND, ComponentLink1Description=Datasheet, ComponentLink1URL=https://www.molex.com/pdm_docs/sd/022272021_sd.pdf, ComponentLink2Description="DigiKey Link", ComponentLink2URL=http://digikey.com/product-detail/en/molex/0022272021/WM4111-ND/1130577, Connector Type=Header, Contact Finish - Mating=Tin, Contact Finish - Post=Tin, Contact Finish Thickness - Mating="100.0µin (2.54µm)", Contact Length - Mating="0.295\" (7.49mm)", Contact Length - Post="0.140\" (3.56mm)", Contact Material=Brass, Contact Shape=Square, Contact Type="Male Pin", Fastening Type="Friction Lock", Insulation Height="0.461\" (11.70mm)", Insulation Material="Polyamide (PA), Nylon", LastUpdated="2020-01-12 23:51:43", Lifecycle Status=Active, Minimum Order=1, Mounting Type="Through Hole", Number of Positions=2, Number of Positions Loaded=All, Number of Rows=1, Overall Contact Length="0.560\" (14.22mm)", Packaging=Bulk, Part Number=0022272021, Part Status=Active, partid=76, Pitch - Mating="0.100\" (2.54mm)", Price=0.27, Series="KK 6410", Shrouding="Shrouded - 1 Wall", Style="Board to Cable/Wire", Supplier 1=DigiKey, Termination=Solder
JP1 JP2 JP3 JP4 JP5 JP6 JP7 JP8: library part MCD-00683, "Header, 2x1, 2,54mm, VR, TH, Height 5.84mm/2.54mm - Shunt Fitted by default", Alternate_Manufacturer=LIANYI, Alternate_Manufacturer_Part_Number=313102S111116, Manufacturer=SAMTEC, Manufacturer_Part_Number=TSW-102-07-x-S, ComponentLink1Description=Datasheet, ComponentLink1URL=http://tunmcdsvn.tun.st.com/Component_Datasheet_Library/Trunk/Connectors/Samtec_TSW-HTSW-series, ECCN_EU=n/a, ECCN_US=n/a, Internal_Part_Number=MCD-00683, Part_Type=Connector, Provided_By=SUBCO, Status=Released
L1 L2 L3 L4 L6 L7: library part LQW18CAR12J00D, "FIXED IND 120NH 1500MA 58MOHM", Current Rating (Amps)=1.5A, DC Resistance (DCR)="58mOhm Max", Device Package="0603 (1608 Metric)", Frequency - Self Resonant=1.5GHz, Inductance Frequency - Test=10MHz, Manufacturer="Murata Electronics", Operating Temperature="-40°C ~ 85°C", Supplier Device Package=0603, Supplier Part Number 1=490-18177-1-ND, Tolerance=±5%, ComponentLink1Description=Datasheet, ComponentLink1URL=https://search.murata.co.jp/Ceramy/image/img/P02/JELF243A-0159.pdf, ComponentLink2Description="DigiKey Link", ComponentLink2URL=http://digikey.com/product-detail/en/murata-electronics/LQW18CAR12J00D/490-18177-1-ND/9742079, Height - Seated (Max)="0.037\" (0.95mm)", Inductance=120nH, LastUpdated="2020-09-06 11:05:19", Lifecycle Status=Active, Material - Core=Ferrite, Minimum Order=1, Mounting Type="Surface Mount", Package / Case="0603 (1608 Metric)", Packaging=TapeAndReel, Part Number=LQW18CAR12J00D, Part Status=Active, partid=1197, Price=0.22, Series=LQW18, Shielding=Unshielded, Size / Dimension="0.063\" L x 0.031\" W (1.60mm x 0.80mm)", Supplier 1=DigiKey, Type=Wirewound
L5: library part 744761212C, "FIXED IND 120NH 300MA 650 MOHM", Current Rating (Amps)=300mA, DC Resistance (DCR)="650mOhm Max", Device Package="0603 (1608 Metric)", Frequency - Self Resonant=1.3GHz, Inductance Frequency - Test=150MHz, Manufacturer="Würth Elektronik", Operating Temperature="-40°C ~ 125°C", Q @ Freq="30 @ 150MHz", Supplier Part Number 1=732-1768-1-ND, Tolerance=±5%, ComponentLink1Description=Datasheet, ComponentLink1URL=https://katalog.we-online.de/pbs/datasheet/744761212C.pdf, ComponentLink2Description="DigiKey Link", ComponentLink2URL=http://digikey.com/product-detail/en/w-rth-elektronik/744761212C/732-1768-1-ND/1994348, Height - Seated (Max)="0.043\" (1.10mm)", Inductance=120nH, LastUpdated="2020-09-06 11:05:21", Lifecycle Status=Active, Material - Core=Ceramic, Minimum Order=1, Mounting Type="Surface Mount", Package / Case="0603 (1608 Metric)", Packaging=TapeAndReel, Part Number=744761212C, Part Status=Active, partid=1481, Price=0.23, Series=WE-KI, Shielding=Unshielded, Size / Dimension="0.065\" L x 0.045\" W (1.65mm x 1.15mm)", Supplier 1=DigiKey, Supplier Device Package="0603 (1608 Metric)", Type=Wirewound
Q1: "Mosfet Array N and P-Channel 200V Surface Mount 8-DFN (4x4)", Package=None, Availability=Unavailable, MF="{'manufacturer': u'Microchip Technology / Atmel'}", MP=TC6320K6-G, Price=None
R1: library part ERJ-8ENF2800V, "RES SMD 280 OHM 1% 1/4W 1206", Device Package="1206 (3216 Metric)", Manufacturer="Panasonic Electronic Components", Operating Temperature="-55°C ~ 155°C", Power (Watts)="0.25W, 1/4W", Ratings=AEC-Q200, Supplier Device Package=1206, Supplier Part Number 1=P280FCT-ND, Temperature Coefficient=±100ppm/°C, Tolerance=±1%, ComponentLink1Description=Datasheet, ComponentLink1URL=https://industrial.panasonic.com/cdbs/www-data/pdf/RDA0000/AOA0000C304.pdf, ComponentLink2Description="DigiKey Link", ComponentLink2URL=https://www.digikey.com/en/products/detail/panasonic-electronic-components/ERJ-8ENF2800V/88757, Composition="Thick Film", Features="Automotive AEC-Q200", Height - Seated (Max)="0.028\" (0.70mm)", LastUpdated="2022-09-19 13:28:39", Lifecycle Status=Active, Minimum Order=1, Number of Terminations=2, Package / Case="1206 (3216 Metric)", Packaging=TapeAndReel, Part Number=ERJ-8ENF2800V, Part Status=Active, partid=43874, Price=0.02, Resistance="280 Ohms", Series=ERJ-8EN, Size / Dimension="0.126\" L x 0.063\" W (3.20mm x 1.60mm)", Supplier 1=DigiKey
R2: library part RNCP1206FTD1K00, "RES 1K OHM 1% 1/2W 1206", Device Package="1206 (3216 Metric)", Manufacturer="Stackpole Electronics Inc", Operating Temperature="-55°C ~ 155°C", Power (Watts)="0.5W, 1/2W", Resistance="1 kOhms", Supplier Device Package=1206, Supplier Part Number 1=RNCP1206FTD1K00CT-ND, Temperature Coefficient=±100ppm/°C, Tolerance=±1%, ComponentLink1Description=Datasheet, ComponentLink1URL=https://www.seielect.com/catalog/sei-rncp.pdf, ComponentLink2Description="DigiKey Link", ComponentLink2URL=https://www.digikey.com/en/products/detail/stackpole-electronics-inc/RNCP1206FTD1K00/2240337, Composition="Thin Film", Features=Anti-Sulfur, Height - Seated (Max)="0.025\" (0.65mm)", LastUpdated="2022-09-19 13:29:57", Lifecycle Status=Active, Minimum Order=1, Number of Terminations=2, Package / Case="1206 (3216 Metric)", Packaging=TapeAndReel, Part Number=RNCP1206FTD1K00, Part Status=Active, partid=26970, Price=0.01, Series=RNCP, Size / Dimension="0.122\" L x 0.059\" W (3.10mm x 1.50mm)", Supplier 1=DigiKey
R3 R4: library part RNCP1206FTD20R0, "RES 20 OHM 1% 1/2W 1206", Device Package="1206 (3216 Metric)", Manufacturer="Stackpole Electronics Inc", Operating Temperature="-55°C ~ 155°C", Power (Watts)="0.5W, 1/2W", Supplier Device Package=1206, Supplier Part Number 1=RNCP1206FTD20R0CT-ND, Temperature Coefficient=±100ppm/°C, Tolerance=±1%, ComponentLink1Description=Datasheet, ComponentLink1URL=https://www.seielect.com/catalog/sei-rncp.pdf, ComponentLink2Description="DigiKey Link", ComponentLink2URL=https://www.digikey.com/en/products/detail/stackpole-electronics-inc/RNCP1206FTD20R0/2240306, Composition="Thin Film", Features=Anti-Sulfur, Height - Seated (Max)="0.025\" (0.65mm)", LastUpdated="2022-09-19 13:29:44", Lifecycle Status=Active, Minimum Order=1, Number of Terminations=2, Package / Case="1206 (3216 Metric)", Packaging=TapeAndReel, Part Number=RNCP1206FTD20R0, Part Status=Active, partid=29216, Price=0.01, Resistance="20 Ohms", Series=RNCP, Size / Dimension="0.122\" L x 0.059\" W (3.10mm x 1.50mm)", Supplier 1=DigiKey
R5 R6 R7 R8: library part KTR18EZPF1503, "RES SMD 150K OHM 1% 1/4W 1206", Device Package="1206 (3216 Metric)", Manufacturer="Rohm Semiconductor", Operating Temperature="-55°C ~ 155°C", Power (Watts)="0.25W, 1/4W", Ratings=AEC-Q200, Supplier Device Package=1206, Supplier Part Number 1=RHM150KAICT-ND, Temperature Coefficient=±100ppm/°C, Tolerance=±1%, ComponentLink1Description=Datasheet, ComponentLink1URL=https://www.rohm.com/datasheet/KTR03EZPF/ktr-e, ComponentLink2Description="DigiKey Link", ComponentLink2URL=https://www.digikey.com/en/products/detail/rohm-semiconductor/KTR18EZPF1503/1983702, Composition="Thick Film", Features="Automotive AEC-Q200, High Voltage", Height - Seated (Max)="0.026\" (0.65mm)", LastUpdated="2022-09-19 13:29:15", Lifecycle Status=Active, Minimum Order=1, Number of Terminations=2, Package / Case="1206 (3216 Metric)", Packaging=TapeAndReel, Part Number=KTR18EZPF1503, Part Status=Active, partid=35710, Price=0.03, Resistance="150 kOhms", Series=KTR, Size / Dimension="0.126\" L x 0.063\" W (3.20mm x 1.60mm)", Supplier 1=DigiKey
R9 R10: library part RK73H2BTTD3322F, "RES 33.2K OHM 1% 1/4W 1206", Device Package="1206 (3216 Metric)", Manufacturer="KOA Speer Electronics, Inc.", Operating Temperature="-55°C ~ 155°C", Power (Watts)="0.25W, 1/4W", Ratings=AEC-Q200, Supplier Device Package=1206, Supplier Part Number 1=2019-RK73H2BTTD3322FCT-ND, Temperature Coefficient=±100ppm/°C, Tolerance=±1%, ComponentLink1Description=Datasheet, ComponentLink1URL=http://www.koaspeer.com/catimages/Products/RK73H/RK73H.pdf, ComponentLink2Description="DigiKey Link", ComponentLink2URL=https://www.digikey.com/en/products/detail/koa-speer-electronics-inc/RK73H2BTTD3322F/10235905, Composition="Thick Film", Features="Automotive AEC-Q200, Moisture Resistant", Height - Seated (Max)="0.028\" (0.70mm)", LastUpdated="2022-09-19 13:29:27", Lifecycle Status=Active, Minimum Order=1, Number of Terminations=2, Package / Case="1206 (3216 Metric)", Packaging=CutTape, Part Number=RK73H2BTTD3322F, Part Status=Active, partid=33401, Price=0.01, Resistance="33.2 kOhms", Series=RK73H, Size / Dimension="0.126\" L x 0.063\" W (3.20mm x 1.60mm)", Supplier 1=DigiKey
R11: library part RT1206BRD0749R9L, "RES SMD 49.9 OHM 0.1% 1/4W 1206", Device Package="1206 (3216 Metric)", Manufacturer=Yageo, Operating Temperature="-55°C ~ 155°C", Power (Watts)="0.25W, 1/4W", Supplier Device Package=1206, Supplier Part Number 1=YAG5080CT-ND, Temperature Coefficient=±25ppm/°C, Tolerance=±0.1%, ComponentLink1Description=Datasheet, ComponentLink1URL=https://www.yageo.com/upload/media/product/productsearch/datasheet/rchip/PYu-RT_1-to-0.01_RoHS_L_11.pdf, ComponentLink2Description="DigiKey Link", ComponentLink2URL=https://www.digikey.com/en/products/detail/yageo/RT1206BRD0749R9L/1079849, Composition="Thin Film", Height - Seated (Max)="0.026\" (0.65mm)", LastUpdated="2023-04-30 19:44:00", Lifecycle Status=Active, Minimum Order=1, Number of Terminations=2, Package / Case="1206 (3216 Metric)", Packaging=TapeAndReel, Part Number=RT1206BRD0749R9L, Part Status=Active, partid=26863, Price=0.09, Resistance="49.9 Ohms", Series=RT, Size / Dimension="0.122\" L x 0.063\" W (3.10mm x 1.60mm)", Supplier 1=DigiKey
R12 R13: library part RC1206FR-0731K6L, "RES 31.6K OHM 1% 1/4W 1206", Device Package="1206 (3216 Metric)", Manufacturer=Yageo, Operating Temperature="-55°C ~ 155°C", Power (Watts)="0.25W, 1/4W", Supplier Device Package=1206, Supplier Part Number 1=311-31.6KFRCT-ND, Temperature Coefficient=±100ppm/°C, Tolerance=±1%, ComponentLink1Description=Datasheet, ComponentLink1URL=https://www.yageo.com/upload/media/product/productsearch/datasheet/rchip/PYu-RC_Group_51_RoHS_L_10.pdf, ComponentLink2Description="DigiKey Link", ComponentLink2URL=https://www.digikey.com/en/products/detail/yageo/RC1206FR-0731K6L/728811, Composition="Thick Film", Features="Moisture Resistant", Height - Seated (Max)="0.026\" (0.65mm)", LastUpdated="2022-09-19 13:29:31", Lifecycle Status=Active, Minimum Order=1, Number of Terminations=2, Package / Case="1206 (3216 Metric)", Packaging=TapeAndReel, Part Number=RC1206FR-0731K6L, Part Status=Active, partid=32438, Price=0.01, Resistance="31.6 kOhms", Series=RC_L, Size / Dimension="0.122\" L x 0.063\" W (3.10mm x 1.60mm)", Supplier 1=DigiKey
R14: library part CRGP1206F1K5, "RES 1.5K OHM 1% 1/2W 1206", Device Package="1206 (3216 Metric)", Manufacturer="TE Connectivity Passive Product", Operating Temperature="-55°C ~ 155°C", Power (Watts)="0.5W, 1/2W", Supplier Device Package=1206, Supplier Part Number 1=A130540CT-ND, Temperature Coefficient=±100ppm/°C, Tolerance=±1%, ComponentLink1Description=Datasheet, ComponentLink1URL=https://www.te.com/commerce/DocumentDelivery/DDEController?Action=srchrtrv&DocNm=9-1773463-9&DocType=DS&DocLang=English, ComponentLink2Description="DigiKey Link", ComponentLink2URL=https://www.digikey.com/en/products/detail/te-connectivity-passive-product/CRGP1206F1K5/8577142, Composition="Thick Film", Features="Pulse Withstanding", Height - Seated (Max)="0.026\" (0.65mm)", LastUpdated="2023-04-30 19:43:51", Lifecycle Status=Active, Minimum Order=1, Number of Terminations=2, Package / Case="1206 (3216 Metric)", Packaging=TapeAndReel, Part Number=CRGP1206F1K5, Part Status=Active, partid=27822, Price=0.03, Resistance="1.5 kOhms", Series=CRGP, Size / Dimension="0.122\" L x 0.061\" W (3.10mm x 1.55mm)", Supplier 1=DigiKey
R15: library part CRG1206F10K, "RES SMD 10K OHM 1% 1/4W 1206", Device Package="1206 (3216 Metric)", Manufacturer="TE Connectivity Passive Product", Operating Temperature="-55°C ~ 155°C", Power (Watts)="0.25W, 1/4W", Supplier Device Package=1206, Supplier Part Number 1=A106069CT-ND, Temperature Coefficient=±100ppm/°C, Tolerance=±1%, ComponentLink1Description=Datasheet, ComponentLink1URL=https://www.te.com/commerce/DocumentDelivery/DDEController?Action=srchrtrv&DocNm=1773204&DocType=DS&DocLang=English, ComponentLink2Description="DigiKey Link", ComponentLink2URL=https://www.digikey.com/en/products/detail/te-connectivity-passive-product/CRG1206F10K/2389909, Composition="Thick Film", Height - Seated (Max)="0.026\" (0.65mm)", LastUpdated="2023-04-30 19:43:59", Lifecycle Status=Active, Minimum Order=1, Number of Terminations=2, Package / Case="1206 (3216 Metric)", Packaging=TapeAndReel, Part Number=CRG1206F10K, Part Status=Active, partid=26989, Price=0.01, Resistance="10 kOhms", Series="CRG, Neohm", Size / Dimension="0.122\" L x 0.061\" W (3.10mm x 1.55mm)", Supplier 1=DigiKey
R16: library part RT1206BRD075KL, "RES SMD 5K OHM 0.1% 1/4W 1206", Device Package="1206 (3216 Metric)", Manufacturer=Yageo, Operating Temperature="-55°C ~ 155°C", Power (Watts)="0.25W, 1/4W", Supplier Device Package=1206, Supplier Part Number 1=YAG5090CT-ND, Temperature Coefficient=±25ppm/°C, Tolerance=±0.1%, ComponentLink1Description=Datasheet, ComponentLink1URL=https://www.yageo.com/upload/media/product/productsearch/datasheet/rchip/PYu-RT_1-to-0.01_RoHS_L_11.pdf, ComponentLink2Description="DigiKey Link", ComponentLink2URL=https://www.digikey.com/en/products/detail/yageo/RT1206BRD075KL/5936961, Composition="Thin Film", Height - Seated (Max)="0.026\" (0.65mm)", LastUpdated="2023-04-30 19:43:23", Lifecycle Status=Active, Minimum Order=1, Number of Terminations=2, Package / Case="1206 (3216 Metric)", Packaging=TapeAndReel, Part Number=RT1206BRD075KL, Part Status=Active, partid=33949, Price=0.09, Resistance="5 kOhms", Series=RT, Size / Dimension="0.122\" L x 0.063\" W (3.10mm x 1.60mm)", Supplier 1=DigiKey
R17 R20: library part CRGCQ1206F100K, "RES 100K OHM 1% 1/4W 1206", Device Package="1206 (3216 Metric)", Manufacturer="TE Connectivity Passive Product", Operating Temperature="-55°C ~ 155°C", Power (Watts)="0.25W, 1/4W", Ratings=AEC-Q200, Supplier Device Package=1206, Supplier Part Number 1=A129834CT-ND, Temperature Coefficient=±100ppm/°C, Tolerance=±1%, ComponentLink1Description=Datasheet, ComponentLink1URL=https://www.te.com/commerce/DocumentDelivery/DDEController?Action=srchrtrv&DocNm=1773204-3&DocType=DS&DocLang=English, ComponentLink2Description="DigiKey Link", ComponentLink2URL=https://www.digikey.com/en/products/detail/te-connectivity-passive-product/CRGCQ1206F100K/8576436, Composition="Thick Film", Features="Automotive AEC-Q200, Moisture Resistant", Height - Seated (Max)="0.026\" (0.65mm)", LastUpdated="2023-04-30 19:43:59", Lifecycle Status=Active, Minimum Order=1, Number of Terminations=2, Package / Case="1206 (3216 Metric)", Packaging=TapeAndReel, Part Number=CRGCQ1206F100K, Part Status=Active, partid=26994, Price=0.01, Resistance="100 kOhms", Series=CRGCQ, Size / Dimension="0.122\" L x 0.061\" W (3.10mm x 1.55mm)", Supplier 1=DigiKey
R18 R21: library part RT1206BRD0740KL, "RES SMD 40K OHM 0.1% 1/4W 1206", Device Package="1206 (3216 Metric)", Manufacturer=Yageo, Operating Temperature="-55°C ~ 155°C", Power (Watts)="0.25W, 1/4W", Supplier Device Package=1206, Supplier Part Number 1=13-RT1206BRD0740KLCT-ND, Temperature Coefficient=±25ppm/°C, Tolerance=±0.1%, ComponentLink1Description=Datasheet, ComponentLink1URL=https://www.yageo.com/upload/media/product/productsearch/datasheet/rchip/PYu-RT_1-to-0.01_RoHS_L_12.pdf, ComponentLink2Description="DigiKey Link", ComponentLink2URL=https://www.digikey.com/en/products/detail/yageo/RT1206BRD0740KL/5936957, Composition="Thin Film", Height - Seated (Max)="0.026\" (0.65mm)", LastUpdated="2023-04-30 19:42:13", Lifecycle Status=Active, Minimum Order=1, Number of Terminations=2, Package / Case="1206 (3216 Metric)", Packaging=TapeAndReel, Part Number=RT1206BRD0740KL, Part Status=Active, partid=58355, Price=0.09, Resistance="40 kOhms", Series=RT, Size / Dimension="0.122\" L x 0.063\" W (3.10mm x 1.60mm)", Supplier 1=DigiKey
R19 R22: library part CR1206-FX-1503ELF, "RES SMD 150K OHM 1% 1/4W 1206", Device Package="1206 (3216 Metric)", Manufacturer="Bourns Inc.", Operating Temperature="-55°C ~ 155°C", Power (Watts)="0.25W, 1/4W", Supplier Device Package=1206, Supplier Part Number 1=CR1206-FX-1503ELFCT-ND, Temperature Coefficient=±100ppm/°C, Tolerance=±1%, ComponentLink1Description=Datasheet, ComponentLink1URL=https://www.bourns.com/docs/Product-Datasheets/CHPREZTR.pdf, ComponentLink2Description="DigiKey Link", ComponentLink2URL=https://www.digikey.com/en/products/detail/bourns-inc/CR1206-FX-1503ELF/2562775, Composition="Thick Film", Features="Moisture Resistant", Height - Seated (Max)="0.030\" (0.75mm)", LastUpdated="2023-04-30 19:43:43", Lifecycle Status=Active, Minimum Order=1, Number of Terminations=2, Package / Case="1206 (3216 Metric)", Packaging=TapeAndReel, Part Number=CR1206-FX-1503ELF, Part Status=Active, partid=29549, Price=0.01, Resistance="150 kOhms", Series=CR1206, Size / Dimension="0.126\" L x 0.063\" W (3.20mm x 1.60mm)", Supplier 1=DigiKey
SW1: library part CMP-03405-000001-1, "SWITCH SLIDE SPDT 200MA 30V", Contact Current Rating=0.2A, Contact Resistance=20mΩ, Manufacturer="TE Connectivity", Operating Force=200gf, Temperature="-20°C to +70°C", Temperature Range High=+70°C, Temperature Range Low=-20°C, Voltage Rating Dc=30V, Automotive=No, Category=Switch, ComponentLink2Description=Datasheet, ComponentLink2URL=https://www.te.com/commerce/DocumentDelivery/DDEController?Action=showdoc&DocId=Customer+Drawing%7F1825232%7FB2%7Fpdf%7FEnglish%7FENG_CD_1825232_B2.pdf%7F1825232-1, Device Class L1=Electromechanical, Device Class L2=Switches, Device Class L3="Slide Switches", Digikey Description="SWITCH SLIDE SPDT 200MA 30V", Electromechanical Life=10000Cycles, Height=3.7mm, Lead Free=Yes, Manufacturer Part Number=1825232-1, Mount="Through Hole", Mouser Description="Slide Switches SLIDE SWITCH SPDT Right Angle", Octopart=https://octopart.com/1825232-1-te+connectivity-45209882, Package=1825232-1, RoHS=TRUE, Throw Configuration=SPDT
U1: library part CMP-024-00000-1, "Driver 2A 2-OUT High and Low Side Inv 12-Pin QFN EP T/R", Case/Package=QFN, Frequency=100kHz, Channel Type=Independent, Fall Time=6ns
U2: library part CMP-09116-000345-1, "IC VGAIN AMP 32LFCSP", Case/Package="LFCSP EP", Input Offset Voltage (Vos)=50mV, Input Resistance=6kR, Max Operating Temperature=85°C, Max Supply Voltage=5.5V, Min Operating Temperature=-40°C, Min Supply Voltage=4.5V, Operating Supply Current=58mA, Operating Supply Voltage=5V, Package Quantity=1500, Power Dissipation=1.97W, Power Supply Rejection Ratio (PSRR)=68dB, Voltage Gain=19dB, -3db Bandwidth=120MHz, Bandwidth=100MHz, Contact Plating=Tin, Gain=55dB, Gain Bandwidth Product=120MHz, Height=0.8mm, Lead Free="Contains Lead", Length=5mm, Mount="Surface Mount", Noise Figure=4.2dB, Number of Amplifiers=2, Number of Channels=2, Number of Elements=2, Number of Pins=32, Packaging="Tape and Reel", Radiation Hardening=No, REACH SVHC="No SVHC", RoHS Compliant=Yes, Series=X-AMP®, Slew Rate=650V/µs, Width=5mm